# Altium PCB Power_v1.PcbDoc
Units mil, origin at the board's own origin, x right, y up, seen from the top; angles counter-clockwise.
Board outline 3105 x 4090 mil, 2 copper layers (Top Layer, Bottom Layer); 17 components, 10 nets, 47 pads, 0 vias.
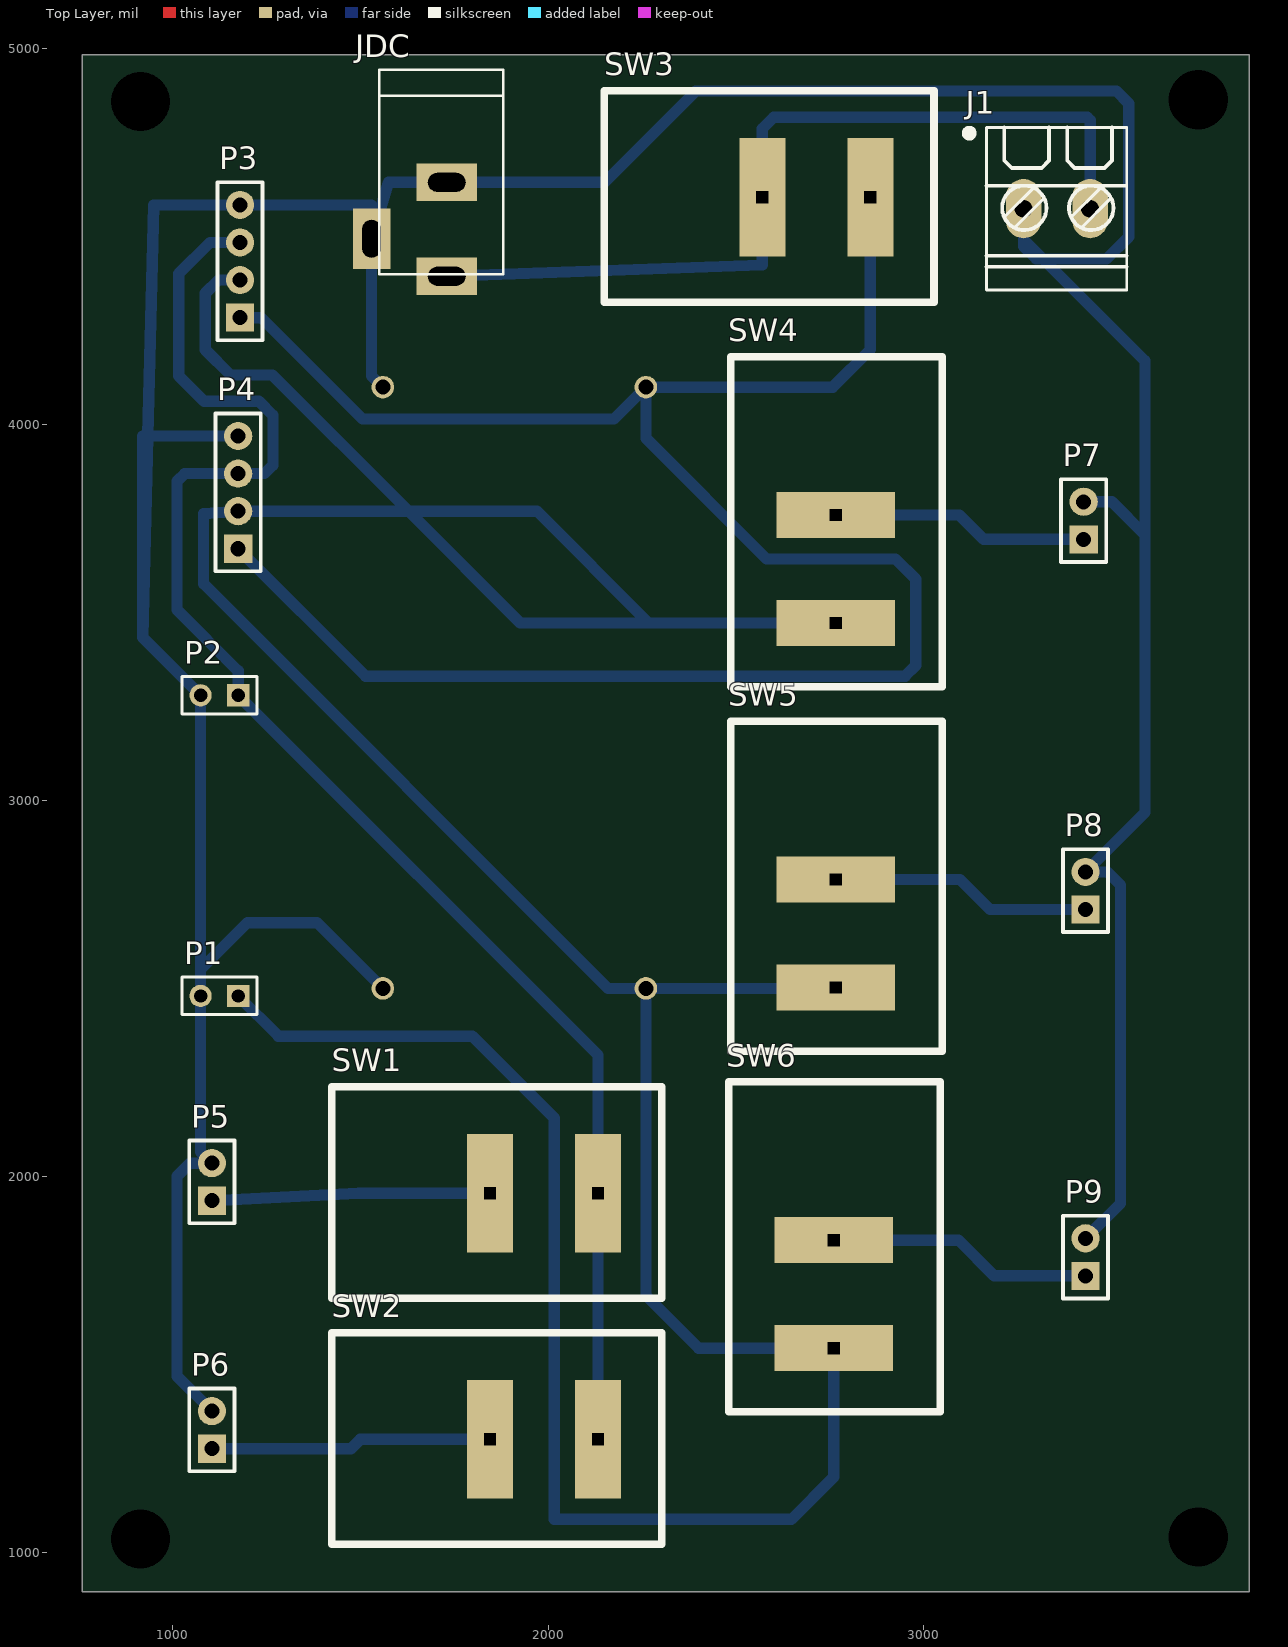
[diagram p0: Top Layer view]
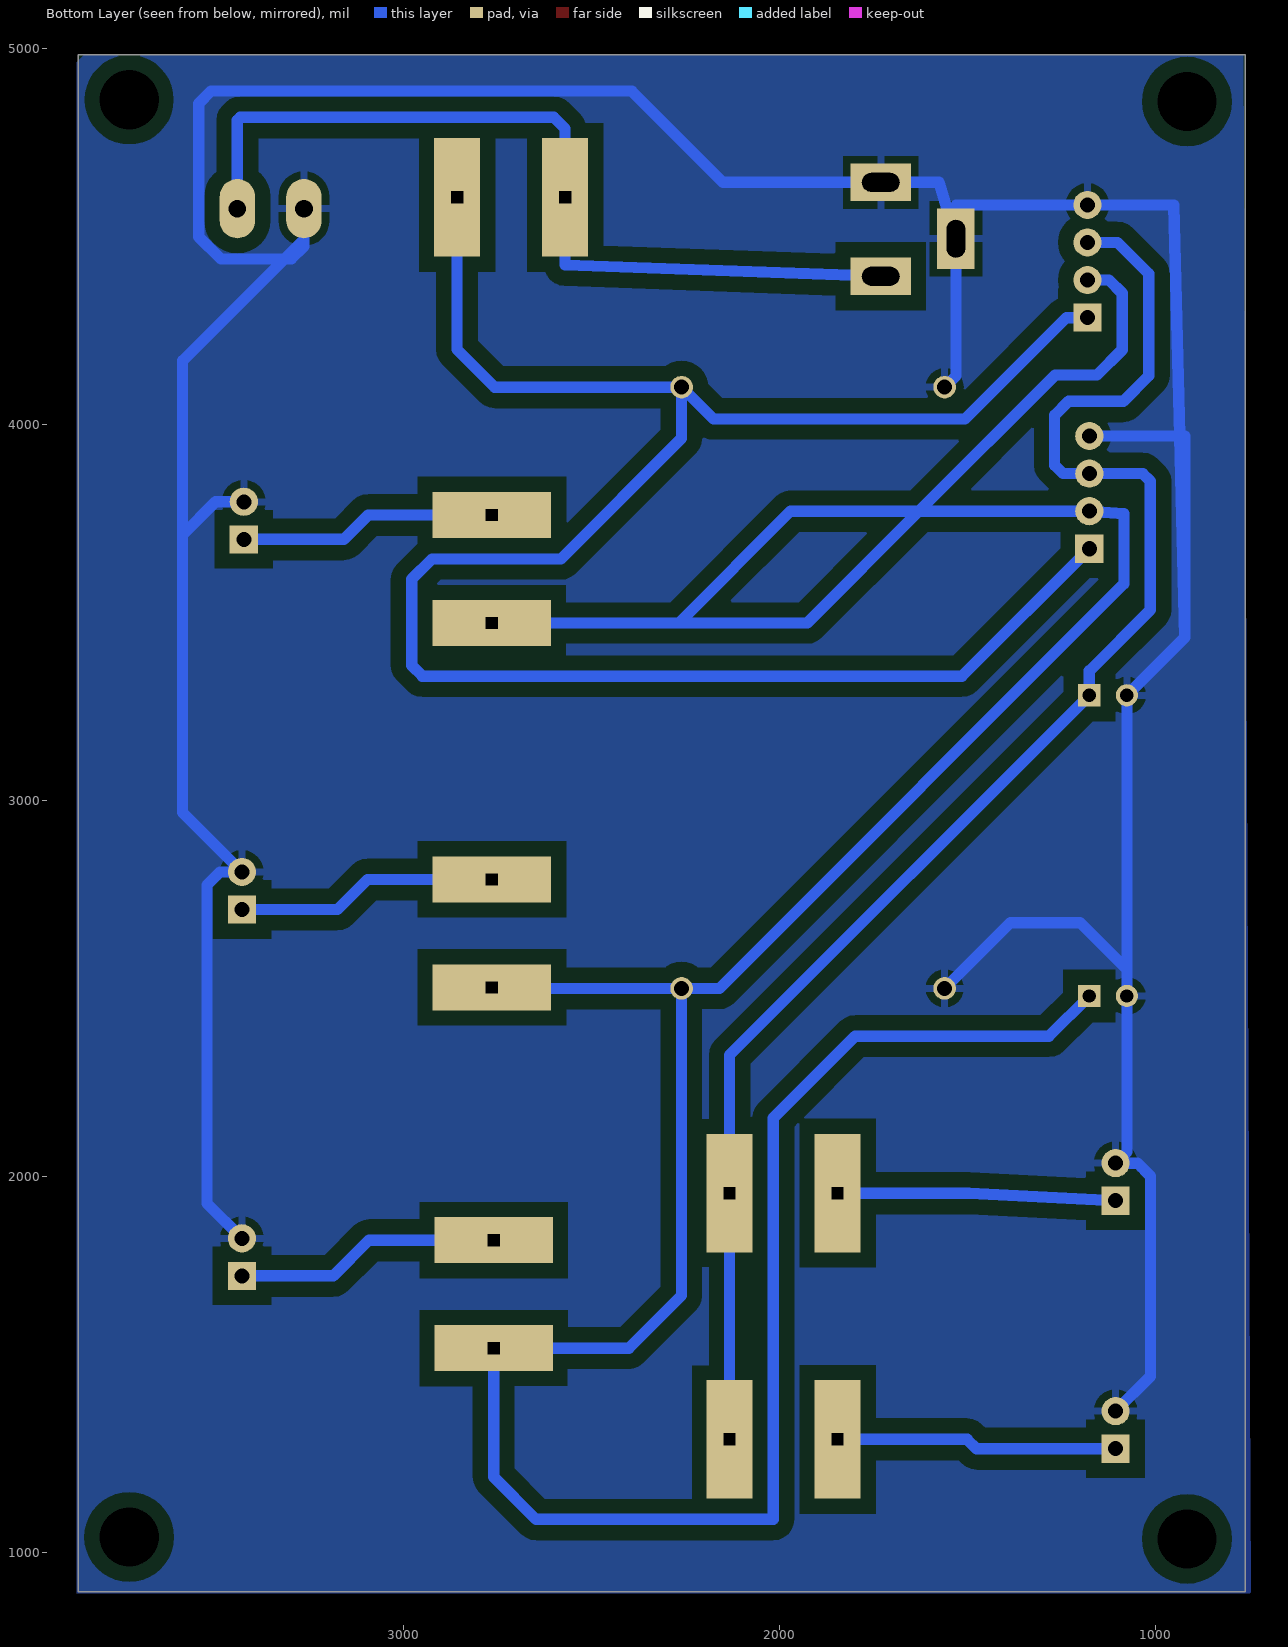
[diagram p1: Bottom Layer view, seen from below]
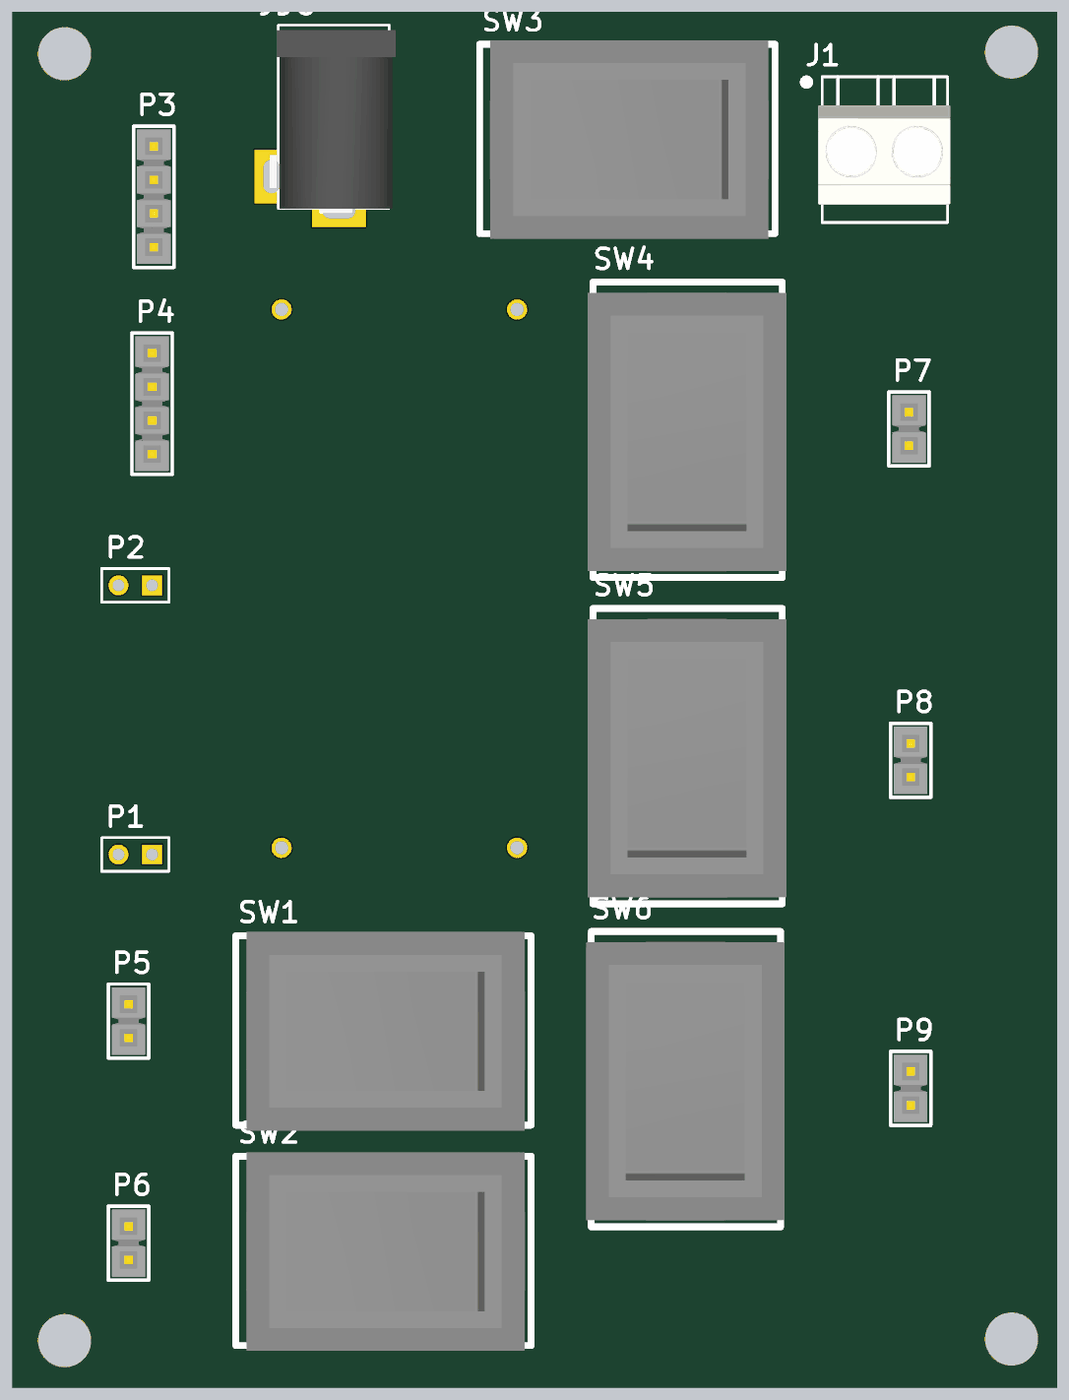
[diagram p2: 3D render of the assembled board from above, using the file's embedded part models]

## Layer stack, top to bottom
Top Solder: solder mask 0.4, Solder Resist, Dk 3.5
Top Layer: signal copper 1.4
Dielectric 1: dielectric 12.6, FR-4, Dk 4.8
Bottom Layer: signal copper 1.4
Bottom Solder: solder mask 0.4, Solder Resist, Dk 3.5

## Board outline
760,895 3865,895 3865,4985 760,4985

## Design rules (kind name [scope] priority, off if disabled: settings)
Clearance [All] p1: gap=40 ignorepadtopadclearanceinfootprint=FALSE
PolygonConnect [All] p1: connectstyle=Relief reliefconductorwidth=20 reliefentries=4 polygonreliefangle="90 Angle" airgapwidth=20
RoutingLayers [All] p1: top layer_v5=FALSE bottom layer_v5=TRUE
RoutingVias [All] p1: holewidth=28 width=50 viastyle="Through Hole" minholewidth=28 minwidth=50 maxholewidth=28 maxwidth=50
SolderMaskExpansion [All] p1: expansion=4
Width [All] p1: maxlimit=40 minlimit=20 preferedwidth=30
29 further rules are at their usual default settings.

## Components (designator, comment, footprint, x,y, rotation, side; value= is the part's Value field where it differs from the comment)
J1 "CON.Domino2" "Domino 2M" 3539.61,4358.46 r90 top
JDC "Jac DC" DC-IN 1630,4520 r270 top
P1 "Header 2" HDR1X2 1175,2480 r180 top
P2 "Header 2" HDR1X2 1175,3280 r180 top
P3 "Header 4" "Header 4" 1180,4285 r90 top
P4 "Header 4" "Header 4" 1175,3670 r90 top
P5 "Header 2" "Header 2" 1105,1935 r90 top
P6 "Header 2" "Header 2" 1105,1275 r90 top
P7 "Header 2" "Header 2" 3425,3695 r90 top
P8 "Header 2" "Header 2" 3430,2710 r90 top
P9 "Header 2" "Header 2" 3430,1735 r90 top
SW1 "SW_BapBenh" SW_Bapbenh 2104.84,1958.94 r90 top
SW2 "SW_BapBenh" SW_Bapbenh 2104.84,1303.94 r90 top
SW3 "SW_BapBenh" SW_Bapbenh 2829.84,4608.94 r90 top
SW4 "SW_BapBenh" SW_Bapbenh 2768.94,3500.16 r0 top
SW5 "SW_BapBenh" SW_Bapbenh 2768.94,2530.16 r0 top
SW6 "SW_BapBenh" SW_Bapbenh 2763.94,1570.16 r0 top

## Footprints (in the part's own frame and the unit in brackets; to place one, negate y for a bottom-side part, rotate by r counter-clockwise, add the part's x,y. Pads: shape width x height; smd on the part's side, far side on the other; paste and mask are expansions set on the pad)
DC-IN [mil] "Jac DC input"
  rect 100x160 hole 50 slot 100 at 90 deg: 1(125,100) 2(-125,100)
  rect 160x100 hole 50 slot 100 at 0 deg: 3(25,-100)
  silkscreen extent -425,-80 120,250, body extent -410,-105 134,269, height 434
"Domino 2M" [mm]
  oval 4x2.4 hole 1.2: 1(5.5,6.975) 2(5.5,2.475)
  silkscreen extent 0,0 11,10.9, body extent 1.35,-0.22 8.85,9.78, height 10
HDR1X2 [mm] "Connector; Header; 2 Position"
  rect 1.5x1.5 hole 0.9: 1(0,0)
  round 1.5 hole 0.9: 2(2.54,0)
  silkscreen extent -1.27,-1.27 3.81,1.27
"Header 2" [mil] "Connector; Header; 2 Position; Solder Pad 35mil"
  rect 75x75 hole 40: 1(0,0)
  round 75 hole 40: 2(100,0)
  silkscreen extent -60,-60 160,60, body extent -50,-50 150,50, height 330
"Header 4" [mil] "Connector; Header; 4 Position; Solder Pad 35mil"
  rect 75x75 hole 40: 1(0,0)
  round 75 hole 40: 2(100,0) 3(200,0) 4(300,0)
  silkscreen extent -60,-60 360,60, body extent -50,-50 350,50, height 330
SW_Bapbenh [mm] "Typical LED; GREEN; RED; 2 Leads; Solder Pad 35mil"
  rect 8x3.1 hole 0.8 square: 1(-0.1,-0.7) 2(-0.1,6.6)
  silkscreen extent -7.2,-5 7.1,17.3, body extent -7.6,-4.55 7.4,16.55, height 16.72

## Part data
J1: "2 pins Domino Header", ComponentLink1Description="Digikey Part link", ComponentLink2Description="Open DataSheet", ComponentLink2URL=H:\LIBRARY\LIBRARY.Datasheet\, Price=2000VND, Publisher="Hoang Nguyen"
JDC: library part DCIN, "Jac DC input"
P1 P2 P5 P6 P7 P8 P9: "Header, 2-Pin", LatestRevisionDate=17-Jul-2002, LatestRevisionNote="Re-released for DXP Platform.", Publisher="Altium Limited"
P3 P4: "Header, 4-Pin", LatestRevisionDate=17-Jul-2002, LatestRevisionNote="Re-released for DXP Platform.", Publisher="Altium Limited"

## Free pads (board coordinates)
  round 60 hole 40: 11(1560,2500) 11(1560,4100) 11(2260,2500) 11(2260,4100)
  round 60 hole 157.48: 12(915,4860) 13(3730,4865) 14(3730,1040) 15(915,1035)

## Nets (pads, with @x,y where several pads share a name; then routed paths per layer and width w, separated by ;. In a path a pad name is that pad's centre, name@x,y a point inside that pad or via, vN(x,y) a via of type N, cw(c..) or ccw(c..) an arc to the next point about the centre after c; other vN are vias at no path point)
3V3: P2.1 P3.3 P4.3 SW1.1 SW2.1 | length 4182.1
  Bottom Layer w30: P3.3 1100,4485 1017,4402 1017,4130 1084.5,4062.5 1230,4062.5 1267.5,4025 1267.5,3892.48 1245.02,3870 P4.3 1033.02,3870 1012.5,3849.48 1012.5,3507.5 1175,3345 P2.1 2132.4,2322.6 SW1.1 SW2.1
5V: P1.1 P3.2 P4.2 pad.11@2260,2500 SW4.1 SW5.1 SW6.1 | length 10414.1
  Bottom Layer w30: P1.1 1282,2373 1798,2373 2016,2155 2016,1087 2647,1087 2760,1200 SW6.1 2400,1542.6 2260,1682.6 pad.11@2260,2500 ; P3.2 1122.5,4385 1087.5,4350 1087.5,4199.5 1154.5,4132.5 1265.8,4132.5 1628.3,3770 ; SW5.1 2669,2502.6 2669,2500 pad.11@2260,2500 ; SW4.1 2267.4,3472.6 ; 1628.3,3770 1970,3770 2267.4,3472.6 ; 1628.3,3770 P4.2 1082.5,3763 1082.5,3577 2159.5,2500 pad.11@2260,2500 ; 1628.3,3770 1925.7,3472.6 2267.4,3472.6
12V: P3.1 P4.1 pad.11@2260,4100 SW3.1 | length 5465.2
  Bottom Layer w30: P4.1 1514,3331 2950,3331 2978,3359 2978,3589 2924,3643 2581,3643 2260,3964 pad.11@2260,4100 ; P3.1 1235.89,4285 1505.89,4015 2175,4015 pad.11@2260,4100 ; SW3.1 2857.4,4200 2757.4,4100 pad.11@2260,4100
GND: J1.1 JDC.2 JDC.3 P1.2 P2.2 P3.4 P4.4 P5.2 P6.2 P7.2 P8.2 P9.2 pad.11@1560,2500 pad.11@1560,4100 | length 12056.4
  Bottom Layer w30: P6.2 1012,1468 1012,2000 1047,2035 P5.2 1075,2065 P1.2 1075,2550 ; P4.4 934.5,3970 ; pad.11@1560,2500 1385,2675 1200,2675 1075,2550 ; pad.11@1560,4100 1530,4130 JDC.3 ; J1.1 3265,4493 ; P7.2 3500,3795 3588,3707 ; P9.2 3523,1928 3523,2775 3488,2810 P8.2 3588,2968 3588,3707 ; 921,3434 934.5,3970 ; 921,3434 921,3970 934.5,3970 ; 921,3434 P2.2 1075,2550 ; 934.5,3970 950,4585 P3.4 1530,4585 JDC.3 ; JDC.3 1575,4645 JDC.2 2150,4645 2393,4888 3512,4888 3545,4855 3545,4500 3486,4441 3317,4441 ; 3265,4493 3317,4441 ; 3265,4493 3265,4475 3299,4441 3317,4441 ; 3317,4441 3588,4170 3588,3707
NetJ1_2: J1.2 JDC.1 SW3.2 | length 2326.4
  Bottom Layer w30: JDC.1 2570,4425 SW3.2 2570,4788 2600,4818 3434.17,4818 3442.17,4810 J1.2
NetP5_1: P5.1 SW1.2 | length 740.5
  Bottom Layer w30: P5.1 1495,1955 SW1.2
NetP6_1: P6.1 SW2.2 | length 750.4
  Bottom Layer w30: P6.1 1475,1275 1500,1300 SW2.2
NetP7_1: P7.1 SW4.2 | length 686.9
  Bottom Layer w30: SW4.2 3094,3760 3159,3695 P7.1
NetP8_1: P8.1 SW5.2 | length 698.1
  Bottom Layer w30: SW5.2 3096,2790 3176,2710 P8.1
NetP9_1: P9.1 SW6.2 | length 709.4
  Bottom Layer w30: SW6.2 3092,1830 3187,1735 P9.1

## Polygon pours and split planes (outlines as drawn)
GND on Bottom Layer "bot" (solid, pour order 8): 765,4985 3850,4985 3870,4965 3870,890 745,890